# EAGLE board schematic-old (EAGLE 6.5.0)
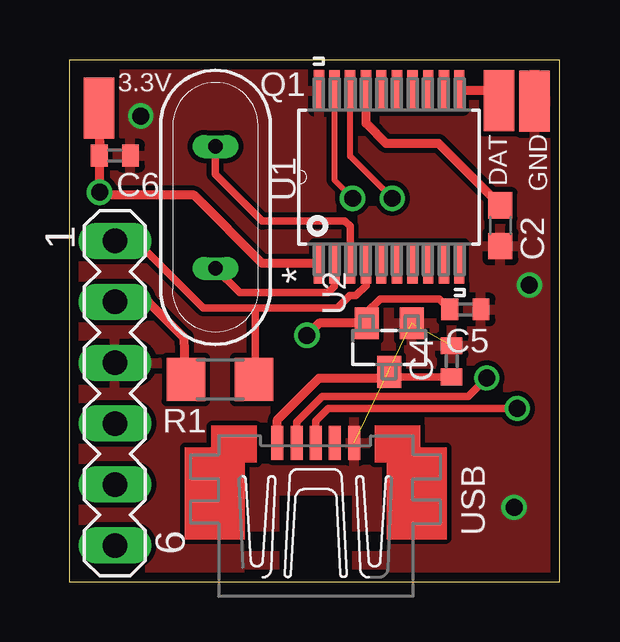
[diagram p0: board, top side]
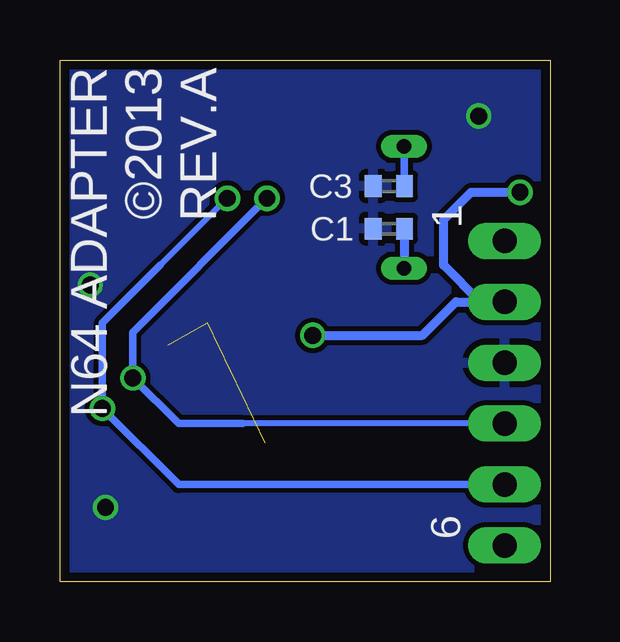
[diagram p1: board, bottom side, seen from below]

Size 20.43 x 21.77 mm. Coordinates in mm from the lower left corner, seen from the top.
Outline: 0,0 20.43,0 20.43,21.77 0,21.77 0,0
Copper layers (1*16): Top 0.0356mm / dielectric 1.5011mm / Bottom 0.0356mm
Design rules "LaenPCBOrder": minimum track width 6mil, minimum drill 13mil, track to track 6mil, track to pad 6mil, pad to pad 6mil, via to via 6mil, smd to smd 6mil, copper to edge 15mil, drill to drill 6mil, minimum pad ring 7mil, minimum via ring 7mil, stop-mask expansion 4mil, vias tented up to drill 0mil, thermal gap 10mil
Net classes: 0 default: width 0.254 mm, drill 0.61 mm, clearance 0.203 mm

## Footprints (pad centres in the part's own frame; a part is rotated, then mirrored left to right if it is on the bottom)
SMD1,27-2,54 = smd 1.27 x 2.54: 1 0,0
C0402 = smd 0.7 x 0.9: 1 -0.65,0; 2 0.65,0
C0603 = smd 1.1 x 1: 1 -0.85,0; 2 0.85,0
QS = drill 0.61 long: 1 -2.54,0; 2 2.54,0
R1206 = smd 1.6 x 1.803: 1 -1.422,0; 2 1.422,0
MA06-1 = drill 1.016 long: 1 -6.35,0; 2 -3.81,0; 3 -1.27,0; 4 1.27,0; 5 3.81,0; 6 6.35,0
SOP65P780X200-20N = smd 1.676 x 0.432: 1 -3.607,2.921; 2 -3.607,2.286; 3 -3.607,1.626; 4 -3.607,0.965; 5 -3.607,0.33; 6 -3.607,-0.33; 7 -3.607,-0.965; 8 -3.607,-1.626; 9 -3.607,-2.286; 10 -3.607,-2.921; 11 3.607,-2.921; 12 3.607,-2.286; 13 3.607,-1.626; 14 3.607,-0.965; 15 3.607,-0.33; 16 3.607,0.33; 17 3.607,0.965; 18 3.607,1.626; 19 3.607,2.286; 20 3.607,2.921
SOT95P237X112-3N = smd 0.991 x 1.321: 1 -0.94,-1.016; 2 0.94,-1.016; 3 0,1.016
UX60-MB-SC = smd 0.5 x 1.4: P$1 -1.55,2.5; P$2 -0.75,2.5; P$3 0.05,2.5; P$4 0.85,2.5; P$5 1.65,2.5

## Placement (x,y rotation side)
3.3V  [SMD1,27-2,54]  1.25,19.75 0 top
C1  33pF  [C0402]  6.73,14.73 180 bottom
C2  330nF  [C0603]  17.97,14.86 270 top
C3  33pF  [C0402]  6.73,16.51 180 bottom
C4  100nF  [C0402]  15.94,9.21 90 top
C5  100nF  [C0402]  16.51,11.37 0 top
C6  100nF  [C0402]  1.91,17.78 0 top
DAT  [SMD1,27-2,54]  17.91,20.07 0 top
GND  [SMD1,27-2,54]  19.39,20.06 0 top
Q1  12MHz  [QS]  6.1,15.62 270 top
R1  10K  [R1206]  6.29,8.45 180 top
SV1  [MA06-1]  1.91,7.87 270 top
U1  PIC18F14K50-I/SS  [SOP65P780X200-20N]  13.34,16.89 90 top
U2  MCP1700T-3302E/TT  [SOT95P237X112-3N]  13.34,9.78 180 top
USB  MINI-USB-UX60-MB-SC  [UX60-MB-SC]  10.22,3.3 0 top

## Library data of the parts
3.3V DAT GND = wirepad
C1-C6 = rcl
Q1 = special
R1 = resistor
SV1 = con-lstb; OC_FARNELL: unknown; OC_NEWARK: unknown
U1 = Microchip_By_element14_Batch_1; MPN: PIC18F14K50-I/SS; OC_FARNELL: 1648504; OC_NEWARK: 77M3105; PACKAGE: SOP-20; SUPPLIER: Microchip
U2 = microchip; MPN: MCP1700T-3302E/TT; OC_FARNELL: 1296592; OC_NEWARK: 88H9817; PACKAGE: SOT23-3; SUPPLIER: Microchip
USB = Ian_Custom

## Nets
GND: C1.2 C2.2 C3.2 C4.2 C5.2 C6.2 GND.1 SV1.3 U1.20 U2.1 USB.P$5
N$1: C4.1 U2.3 USB.P$1
N$2: 3.3V.1 C5.1 C6.1 R1.2 SV1.2 U1.1 U2.2
N$3: SV1.4 U1.19 USB.P$2
N$4: SV1.5 U1.18 USB.P$3
N$5: R1.1 SV1.1 U1.4
N$6: C2.1 U1.17
N$7: C1.1 Q1.2 U1.2
N$8: C3.1 Q1.1 U1.3
N$10: DAT.1 U1.11

## Tracks (layer width: path | path; a pad name or v marks a point on that pad's centre or on a via)
GND  (via drill 0.7)  (2 unrouted)
  other vias: 18.54,3.11 19.18,12.38 2.98,19.43
  pour Top: -0.64,29.84 22.86,29.84 22.23,-1.91 -1.27,-1.91
  pour Bottom: -0.64,29.84 -1.27,-1.91 22.23,-1.91 22.86,29.84
N$1
  Top 0.305: U2.3 13.34,8.56 C4.1
  Top 0.381: USB.P$1 8.67,6.77 10.41,8.51 13.08,8.51 U2.3
N$2  (via drill 0.7)
  Top 0.305: U2.2 12.39,11.25 12.95,11.81 15.41,11.81 C5.1
  Top 0.381: 3.3V.1 1.25,20.01 C6.1 1.27,18.4 v1.27,16.26 1.4,16.13 5.21,16.13 8.05,13.28 U1.1 | v9.91,10.29 10.41,10.79 U2.2 | R1.2 4.8,10.19 3.3,11.68 SV1.2
  Bottom 0.381: v9.91,10.29 5.33,10.29 3.94,11.68 SV1.2 2.92,11.68 4.45,13.21 4.45,15.11 3.3,16.26 v1.27,16.26
N$3  (via drill 0.7)
  Top 0.254: U1.19 11.05,16.76 v11.81,16
  Top 0.305: USB.P$2 9.47,6.68 10.54,7.75 16.64,7.75 v17.4,8.51
  Bottom 0.254: SV1.4 12.83,6.6
  Bottom 0.305: 12.83,6.6 15.49,6.6 v17.4,8.51 17.4,10.41 v11.81,16
N$4  (via drill 0.7)
  Top 0.254: v13.46,16 11.71,17.75 U1.18
  Top 0.305: USB.P$3 10.27,6.72 10.79,7.24 v18.67,7.24
  Bottom 0.254: 16.26,13.21 v13.46,16
  Bottom 0.305: SV1.5 15.49,4.06 v18.67,7.24 18.67,10.79 16.26,13.21
N$5
  Top 0.305: U1.4 12.37,12.37 11.94,11.94 11.68,11.94 11.18,11.43 7.75,11.43 | 7.75,11.43 5.59,11.43 2.79,14.22 SV1.1 | R1.1 7.75,8.7 7.75,11.43
N$6
  Top 0.381: C2.1 15.39,18.29 13.21,18.29 12.37,19.13 U1.17
N$7
  Top 0.305: U1.2 11.05,12.32 10.79,12.06 7.11,12.06 Q1.2
  Bottom 0.381: C1.1 6.08,13.48 Q1.2
N$8
  Top 0.305: U1.3 11.71,14.83 11.49,15.05 8.05,15.05 6.08,17.02 6.08,18.15 Q1.1
  Bottom 0.305: C3.1 6.08,18.15 Q1.1
N$10
  Top 0.305: DAT.1 17.73,20.5
  Top 0.381: 17.73,20.5 U1.11

## Text on the board
bNames: N64 ADAPTER / ©2013 / REV.A | 1 | 6